# EAGLE board LFO (EAGLE 7.5.0)

Size 101.27 x 62.22 mm. Coordinates in mm from the lower left corner, seen from the top.
Outline: 0,0 101.27,0 101.27,62.22 0,62.22 0,0
Copper layers (1*16): Top 0.035mm / dielectric 1.5mm / Bottom 0.035mm
Design rules "default": minimum track width 10mil, minimum drill 24mil, track to track 8mil, track to pad 8mil, pad to pad 8mil, via to via 8mil, smd to smd 8mil, copper to edge 40mil, drill to drill 8mil, minimum pad ring 10mil, minimum via ring 8mil, stop-mask expansion 4mil, vias tented up to drill 0mil, thermal gap 10mil
Net classes: 0 default: width 0.508 mm, clearance 0.508 mm; 1 Power: width 1.016 mm, clearance 0.508 mm

## Footprints (pad centres in the part's own frame; a part is rotated, then mirrored left to right if it is on the bottom)
C050-045X075 = drill 0.813 octagon: 1 -2.54,0; 2 2.54,0
C5B2.5 = drill 0.813 pad 1.6 octagon: 1 -2.54,0; 2 2.54,0
E2,5-7 = drill 0.813 pad 1.6: + -1.27,0 | drill 0.813 pad 1.6 octagon: - 1.27,0
DO41-10 = drill 1.118: A 5.08,0; C -5.08,0
3,17/1,1 = drill 1.118 pad 3.175 octagon: 1 0,0
DIL14 = drill 0.813 long: 1 -7.62,-3.81; 2 -5.08,-3.81; 3 -2.54,-3.81; 4 0,-3.81; 5 2.54,-3.81; 6 5.08,-3.81; 7 7.62,-3.81; 8 7.62,3.81; 9 5.08,3.81; 10 2.54,3.81; 11 0,3.81; 12 -2.54,3.81; 13 -5.08,3.81; 14 -7.62,3.81
0207/10 = drill 0.813 octagon: 1 -5.08,0; 2 5.08,0
3RP/1610N = drill 1.2 pad 2.184: 1 -5,0; 2 0,0; 3 5,0
S75P = drill 0.813 octagon: A -2.54,0; E 2.54,0; S 0,2.54
TO92 = drill 0.813 octagon: 1 1.27,0; 2 0,1.905; 3 -1.27,0
3,2 = hole 3.2: 0,0
1503_02 = smd 2.5 x 1.5: 1 -3.75,-10.75; 3 3.75,-10.75 | smd 2.5 x 2: 2 -3.75,-1.9; 2@2 3.75,-1.9 | hole 1: -2.5,-7; 2.5,-7

## Placement (x,y rotation side)
C1  [C050-045X075]  33.02,36.83 0 top
C2  [C050-045X075]  22.86,36.83 0 top
C3  100n  [C5B2.5]  39.37,33.02 90 top
C4  100n  [C5B2.5]  62.23,33.02 90 top
C5  [C050-045X075]  45.72,41.91 0 top
C6  [C050-045X075]  68.58,36.83 0 top
C7  [C050-045X075]  78.74,36.83 0 top
C10  [C050-045X075]  55.88,41.91 0 top
C16  10u  [E2,5-7]  88.9,46.99 0 top
C17  10u  [E2,5-7]  88.9,36.83 0 top
D1  1N4004  [DO41-10]  21.59,41.91 0 top
D2  1N4004  [DO41-10]  34.29,41.91 0 top
D3  1N4004  [DO41-10]  67.31,41.91 0 top
D4  1N4004  [DO41-10]  80.01,41.91 0 top
GND  [3,17/1,1]  97.79,41.91 0 top
IC1  TL074P  [DIL14]  50.8,33.02 0 top
R1  [0207/10]  12.7,12.7 0 top
R2  [0207/10]  38.1,12.7 0 top
R3  [0207/10]  25.4,12.7 0 top
R4  [0207/10]  12.7,16.51 0 top
R5  [0207/10]  38.1,16.51 0 top
R6  10k  [3RP/1610N]  40.64,3.81 0 top
R7  10k  [3RP/1610N]  20.32,3.81 0 top
R8  [0207/10]  25.4,16.51 0 top
R9  [0207/10]  12.7,20.32 0 top
R10  [0207/10]  38.1,20.32 0 top
R11  [S75P]  68.58,55.88 0 top
R12  [0207/10]  25.4,20.32 0 top
R13  [0207/10]  12.7,24.13 0 top
R14  [0207/10]  50.8,24.13 0 top
R15  [0207/10]  38.1,24.13 0 top
R16  [S75P]  78.74,55.88 0 top
R17  [0207/10]  25.4,24.13 0 top
R18  [0207/10]  63.5,24.13 0 top
R19  [0207/10]  63.5,20.32 0 top
R20  [0207/10]  76.2,24.13 0 top
R21  [0207/10]  76.2,20.32 0 top
R22  [0207/10]  88.9,24.13 0 top
R23  [0207/10]  50.8,20.32 0 top
R24  [0207/10]  63.5,16.51 0 top
R25  [0207/10]  76.2,16.51 0 top
R26  [0207/10]  88.9,20.32 0 top
R27  [S75P]  68.58,48.26 0 top
R28  [0207/10]  50.8,16.51 0 top
R29  [0207/10]  63.5,12.7 0 top
R30  [0207/10]  76.2,12.7 0 top
R31  [0207/10]  88.9,16.51 0 top
R32  [S75P]  78.74,48.26 0 top
R33  [0207/10]  50.8,12.7 0 top
R34  [0207/10]  88.9,12.7 0 top
R35  10k  [3RP/1610N]  60.96,3.81 0 top
R36  10k  [3RP/1610N]  81.28,3.81 0 top
T1  BC237  [TO92]  31.75,30.48 0 top
T2  BC237  [TO92]  24.13,30.48 0 top
T3  BC237  [TO92]  68.58,30.48 0 top
T4  BC237  [TO92]  77.47,30.48 0 top
U$1  [3,2]  96.52,57.15 0 top
U$2  [3,2]  5.08,57.15 0 top
U$3  [3,2]  5.08,5.08 0 top
U$4  [3,2]  96.52,5.08 0 top
VCC  [3,17/1,1]  97.79,46.99 0 top
VEE  [3,17/1,1]  97.79,36.83 0 top
X1  1503_02  [1503_02]  17.78,62.23 0 top
X2  1503_02  [1503_02]  30.48,62.23 0 top
X3  1503_02  [1503_02]  55.88,62.23 0 top
X4  1503_02  [1503_02]  43.18,62.23 0 top

## Library data of the parts
C1 C2 C5-C7 C10 C16 C17 R1-R5 R8-R10 R12-R15 R17-R26 R28-R31 R33 R34 = rcl
C3 C4 = capacitor-wima
D1-D4 = diode
GND VCC VEE = wirepad
IC1 = linear
R6 R7 R11 R16 R27 R32 R35 R36 = pot
T1-T4 = transistor
U$1-U$4 = holes
X1-X4 = con-lumberg; OC_FARNELL: 1216979; OC_NEWARK: unknown

## Nets
GND: C16.- C17.+ GND.1 IC1.5 IC1.12 R10.1 R13.1 R18.1 R26.1 R29.1 R34.1 T1.1 T2.1 T3.1 T4.1 X1.1 X2.1 X3.1 X4.1
N$1: C2.2 R2.1 T2.2
N$2: C2.1 D2.A R3.1
N$3: D1.C R5.1 T2.3
N$4: C1.2 D1.A R1.1
N$5: C1.1 R4.2 T1.2
N$6: D2.C IC1.2 R8.1 T1.3
N$7: R4.1 R7.3
N$8: R2.2 R7.1
N$9: R6.2 R6.3 R7.2
N$10: R16.S X2.2 X2.3
N$11: IC1.3 R9.1 R10.2
N$12: R11.A R13.2
N$13: IC1.1 R12.2 R14.1
N$14: R11.E R12.1
N$15: R11.S X1.2 X1.3
N$16: C5.1 IC1.7 R15.1 R17.2
N$17: C5.2 IC1.6 R14.2 R15.2
N$18: D3.C R23.1 T4.3
N$19: C6.2 D3.A R19.1
N$20: R16.A R18.2
N$21: R16.E R17.1
N$22: C6.1 R22.2 T3.2
N$23: C7.2 R20.1 T4.2
N$24: C7.1 D4.A R21.1
N$25: D4.C IC1.9 R24.1 T3.3
N$26: R22.1 R36.3
N$27: R20.2 R36.1
N$28: R35.2 R35.3 R36.2
N$29: IC1.10 R25.1 R26.2
N$30: IC1.8 R28.2 R30.1
N$31: R27.A R29.2
N$32: R27.E R28.1
N$33: C10.1 IC1.14 R31.1 R33.2
N$34: C10.2 IC1.13 R30.2 R31.2
N$35: R32.A R34.2
N$36: R32.E R33.1
N$37: R27.S X3.2 X3.3
N$38: R32.S X4.2 X4.3
VCC: C16.+ IC1.4 R1.2 R3.2 R5.2 R8.2 R9.2 R19.2 R21.2 R23.2 R24.2 R25.2 VCC.1
VEE [Power]: C17.- IC1.11 VEE.1

## Tracks (layer width: path | path; a pad name or v marks a point on that pad's centre or on a via)
GND  (18 unrouted)
N$1  (2 unrouted)
N$2  (2 unrouted)
N$3  (2 unrouted)
N$4  (2 unrouted)
N$5  (2 unrouted)
N$6  (3 unrouted)
N$7  (1 unrouted)
N$8  (1 unrouted)
N$9  (2 unrouted)
N$10  (2 unrouted)
N$11  (2 unrouted)
N$12  (1 unrouted)
N$13  (2 unrouted)
N$14  (1 unrouted)
N$15  (2 unrouted)
N$16  (3 unrouted)
N$17  (3 unrouted)
N$18  (2 unrouted)
N$19  (2 unrouted)
N$20  (1 unrouted)
N$21  (1 unrouted)
N$22  (2 unrouted)
N$23  (2 unrouted)
N$24  (2 unrouted)
N$25  (3 unrouted)
N$26  (1 unrouted)
N$27  (1 unrouted)
N$28  (2 unrouted)
N$29  (2 unrouted)
N$30  (2 unrouted)
N$31  (1 unrouted)
N$32  (1 unrouted)
N$33  (3 unrouted)
N$34  (3 unrouted)
N$35  (1 unrouted)
N$36  (1 unrouted)
N$37  (2 unrouted)
N$38  (2 unrouted)
VCC  (12 unrouted)
VEE  (2 unrouted)